# Altium PCB RGB_pcb.PcbDoc
Units mm, origin at the board's own origin, x right, y up, seen from the top; angles counter-clockwise.
Board outline 104 x 110 mm, 2 copper layers (Top Layer, Bottom Layer); 43 components, 45 nets, 164 pads, 15 vias.
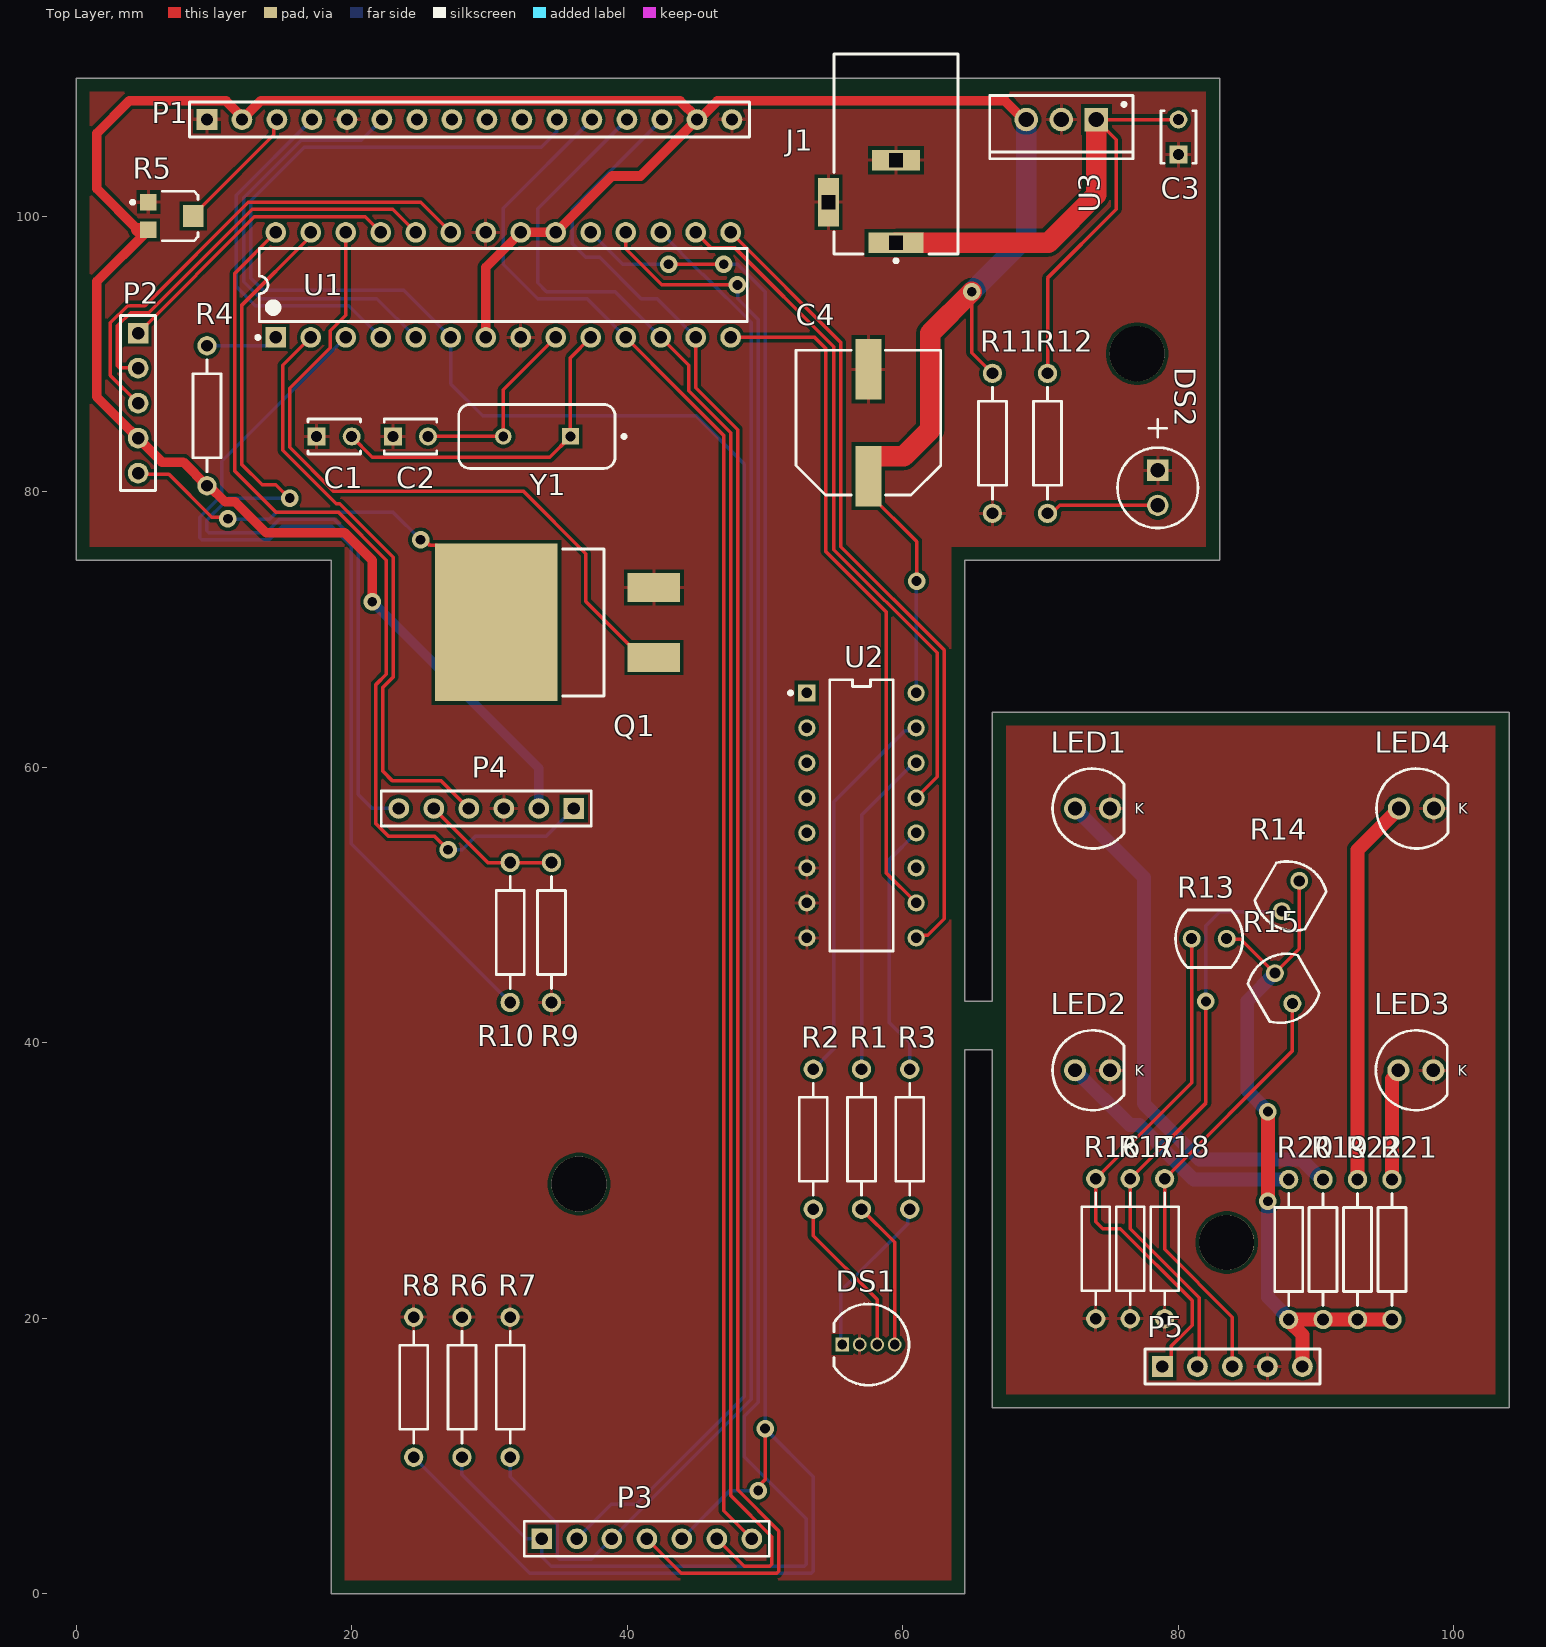
[diagram p0: Top Layer view]
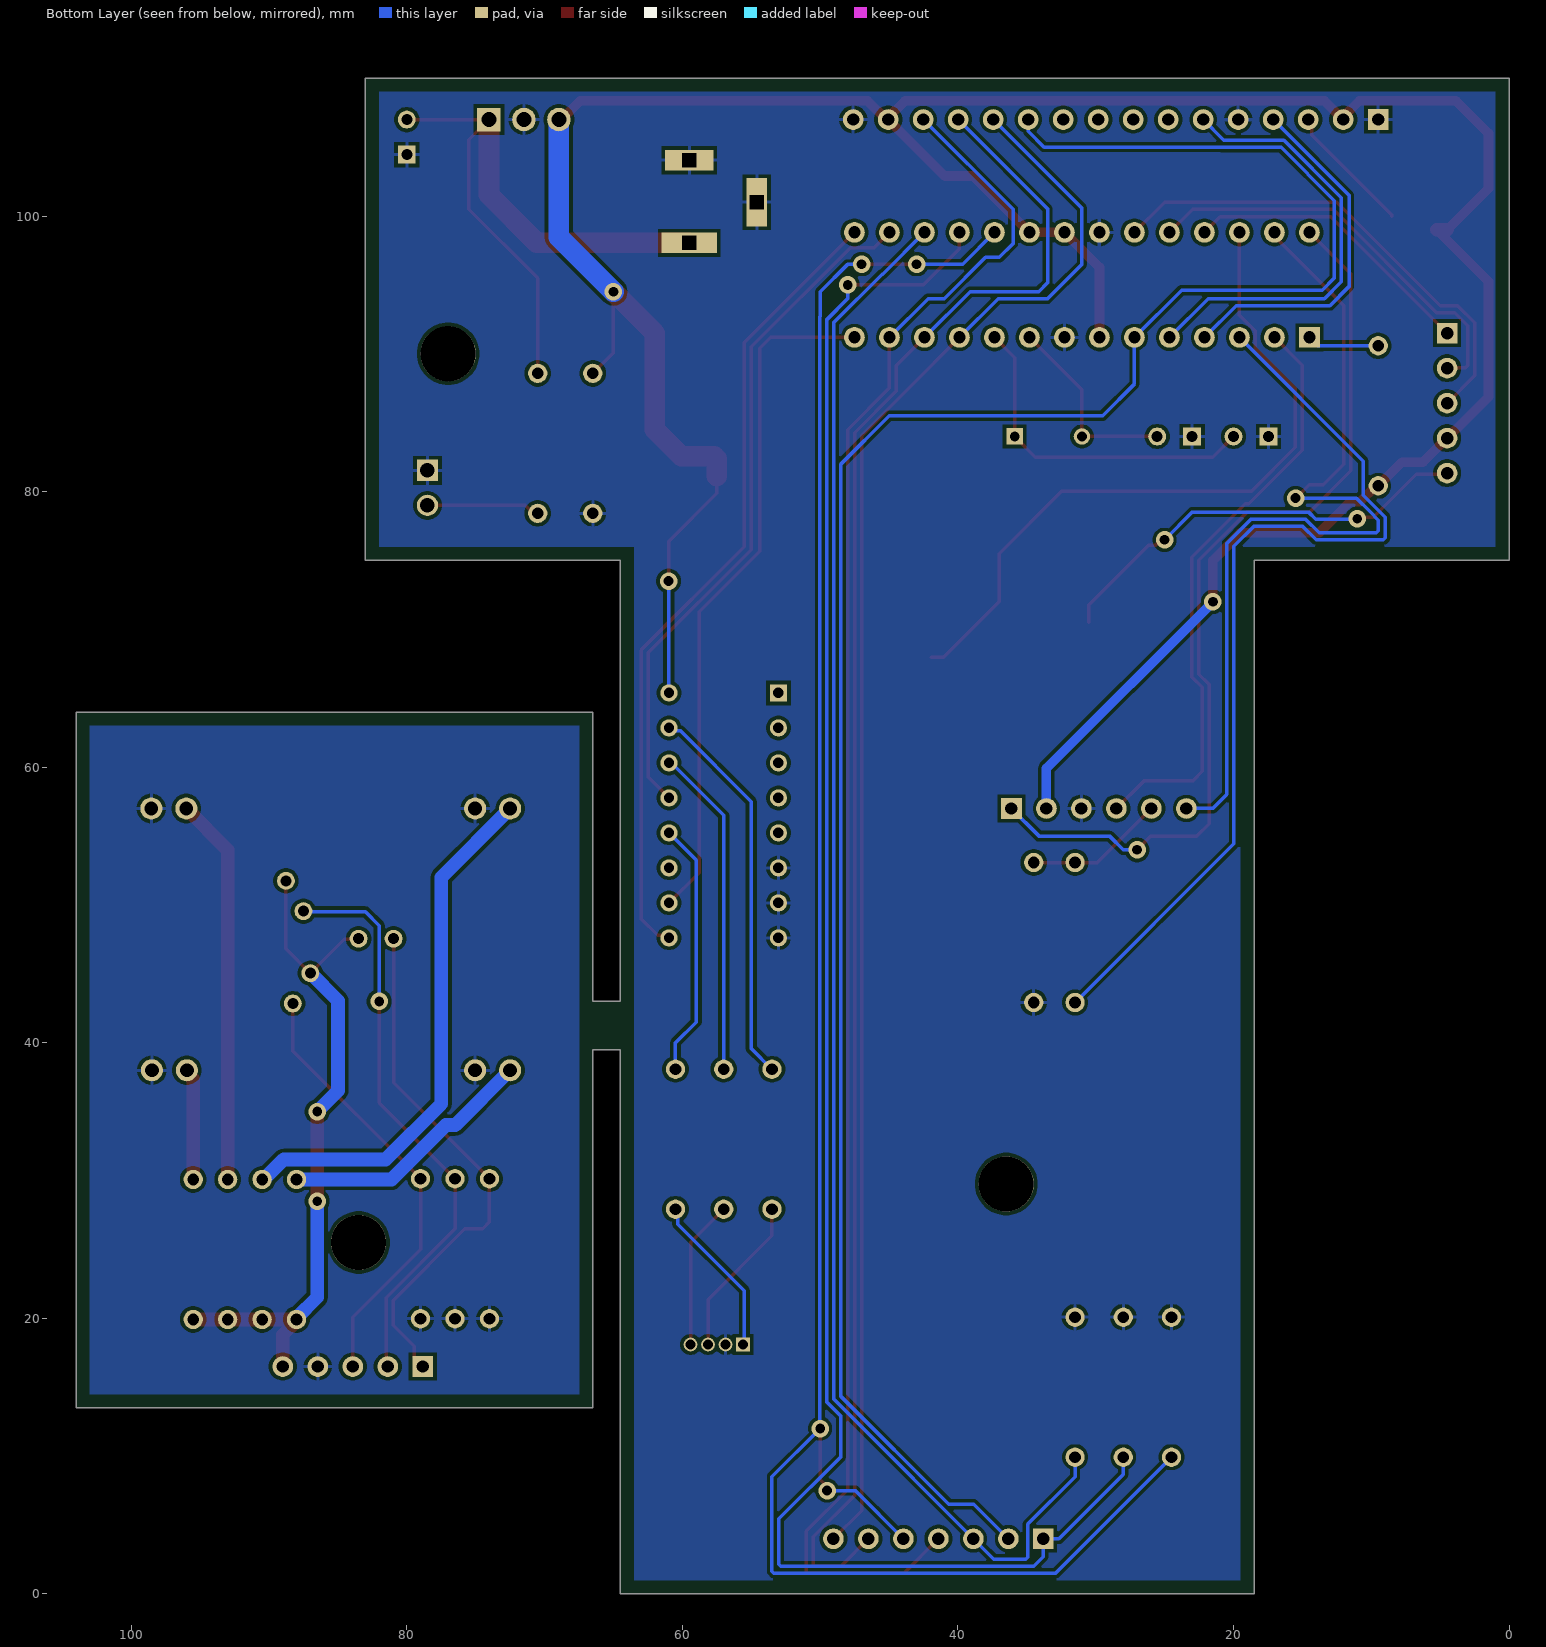
[diagram p1: Bottom Layer view, seen from below]

## Layer stack, top to bottom
Top Solder: solder mask 0.0102, Solder Resist, Dk 3.5
Top Layer: signal copper 0.0356
Dielectric 1: dielectric 0.32, FR-4, Dk 4.8
Bottom Layer: signal copper 0.0356
Bottom Solder: solder mask 0.0102, Solder Resist, Dk 3.5

## Board outline
64.5,39.5 66.5,39.5 66.5,13.5 104,13.5 104,64 66.5,64 66.5,43 64.5,43 64.5,75 83,75 83,110 0,110 0,75 18.5,75 18.5,0 64.5,0

## Design rules (kind name [scope] priority, off if disabled: settings)
Clearance [All] p1: gap=0.254 ignorepadtopadclearanceinfootprint=FALSE except(0: Arc-Hole Track-Hole SMDPad-Hole THPad-Hole Via-Hole Fill-Hole Poly-Hole Region-Hole Text-Hole)
FanoutControl Fanout_Default [All] p1: bgadir=Out bgaviamode=Centered fanoutstyle=Auto fanoutdirection=Alternating viagrid=0.025 // Fanout_Default (Default Rule)
FanoutControl Fanout_Small [(CompPinCount < 5)] p2: bgadir=Out bgaviamode=Centered fanoutstyle=Auto fanoutdirection=OutThenIn viagrid=0.025 // Fanout_Small (Default Rule)
FanoutControl Fanout_LCC [IsLCC] p4: bgadir=Out bgaviamode=Centered fanoutstyle=Auto fanoutdirection=Alternating viagrid=0.025 // Fanout_LCC (Default Rule)
FanoutControl Fanout_BGA [IsBGA] p5: bgadir=Out bgaviamode=Centered fanoutstyle=Auto fanoutdirection=Alternating viagrid=0.025 // Fanout_BGA (Default Rule)
PolygonConnect [All] p1: connectstyle=Relief reliefconductorwidth=0.254 reliefentries=4 polygonreliefangle="90 Angle" airgapwidth=0.254
RoutingVias [All] p1: holewidth=0.711 width=1.27 viastyle="Through Hole" minholewidth=0.711 minwidth=1.27 maxholewidth=0.711 maxwidth=1.27
SolderMaskExpansion [All] p1: expansion=0.102 istentingtop=FALSE
Width [All] p1: maxlimit=5 minlimit=0.254 preferedwidth=0.254
26 further rules are at their usual default settings.

## Components (designator, comment, footprint, x,y, rotation, side; value= is the part's Value field where it differs from the comment)
C1 "22pF" KEMT-C315-THT-2 18.73,84 r0 top
C2 "22pF" KEMT-C315-THT-2 24.27,84 r0 top
C3 "0.22uF" KEMT-C315-THT-2 80,105.73 r90 top
C4 "220UF" PNSC-EEE-1HA221P_L 57.5,85 r90 top
DS1 "" KING-WP154A4SUREQBFZGC_V 57.5,18.095 r90 top
DS2 "HLMP-3301" AVAG-HLMP-3301-2 78.5,81.54 r270 top
J1 "12-9 v" LUMB-NEB21R_V 59.5,104.5 r180 top
LED1 "151053RS03000" "Type 5mm" 73.77,57 r0 top
LED2 "151053RS03000" "Type 5mm" 73.77,38 r0 top
LED3 "151053RS03000" "Type 5mm" 97.23,38 r0 top
LED4 "151053RS03000" "Type 5mm" 97.27,57 r0 top
P1 "Header 16" HDR1X16 9.5,107 r0 top
P2 "Header 5" HDR1X5 4.5,91.5 r270 top
P3 "Header 7" HDR1X7 33.8,4 r0 top
P4 "Header 6" HDR1X6 36.12,57 r180 top
P5 "Header 5" HDR1X5 78.84,16.5 r0 top
Q1 "IRLZ44N" FP-PG-TO263-3-MFG 34.945,70.5 r90 top
R1 "100" AXIAL-0.4 57,33 r90 top
R2 "110" AXIAL-0.4 53.5,33 r90 top
R3 "100" AXIAL-0.4 60.5,33 r90 top
R4 "10K" AXIAL-0.4 9.5,85.5 r270 top
R5 "10K" BOUR-TC33X-2_V 7.05,100 r0 top
R6 "10K" AXIAL-0.4 28,15 r270 top
R7 "10K" AXIAL-0.4 31.5,15 r270 top
R8 "10K" AXIAL-0.4 24.5,15 r270 top
R9 "2K" AXIAL-0.4 34.5,48 r90 top
R10 "1K" AXIAL-0.4 31.5,48 r270 top
R11 "1M" AXIAL-0.4 66.5,83.5 r90 top
R12 "470" AXIAL-0.4 70.5,83.5 r90 top
R13 "VT90N1" EXCE-VT90N1 82.23,47.55 r0 top
R14 "VT90N1" EXCE-VT90N1 88.135,50.65 r60 top
R15 "VT90N1" EXCE-VT90N1 87.635,43.95 r120 top
R16 "10K" AXIAL-0.4 74,25.05 r90 top
R17 "10K" AXIAL-0.4 76.5,25.05 r90 top
R18 "10K" AXIAL-0.4 79,25.05 r90 top
R19 "220" AXIAL-0.4 90.5,25 r270 top
R20 "220" AXIAL-0.4 88,25 r270 top
R21 "220" AXIAL-0.4 95.5,25 r270 top
R22 "220" AXIAL-0.4 93,25 r270 top
U1 "ATmega328-PU" 28P3 31,95 r90 top
U2 "CD4052BE" FP-N0016A-MFG 57,56.5 r0 top
U3 "L78M05CV" TO220 71.5,107 r180 top
Y1 "FOXSLF/160-20" FOX-FOXSLF160-20 33.44,84 r180 top

## Footprints (in the part's own frame and the unit in brackets; to place one, negate y for a bottom-side part, rotate by r counter-clockwise, add the part's x,y. Pads: shape width x height; smd on the part's side, far side on the other; paste and mask are expansions set on the pad)
28P3 [mm] "28-Pin Plastic Dual In-Line Package (PDIP)"
  rect 1.5x1.5 hole 0.9: 1(-3.81,16.51)
  round 1.5 hole 0.9: 2(-3.81,13.97) 3(-3.81,11.43) 4(-3.81,8.89) 5(-3.81,6.35) 6(-3.81,3.81) 7(-3.81,1.27) 8(-3.81,-1.27) 9(-3.81,-3.81) 10(-3.81,-6.35) 11(-3.81,-8.89) 12(-3.81,-11.43) 13(-3.81,-13.97) 14(-3.81,-16.51) 15(3.81,-16.51) 16(3.81,-13.97) 17(3.81,-11.43) 18(3.81,-8.89) 19(3.81,-6.35) 20(3.81,-3.81) 21(3.81,-1.27) 22(3.81,1.27) 23(3.81,3.81) 24(3.81,6.35) 25(3.81,8.89) 26(3.81,11.43) 27(3.81,13.97) 28(3.81,16.51)
  silkscreen extent -3.93,-17.7 2.65,17.93, body extent -3.6,-17.65 3.6,17.65, height 4.58
AVAG-HLMP-3301-2 [mm] "THD, 2-Leads, Body Dia 5.85mm"
  rect 1.55x1.55 hole 1.05: 1(0,0)
  round 1.55 hole 1.05: 2(2.54,0)
  silkscreen extent -3.68,-2.92 4.19,2.92
AXIAL-0.4 [mm] "Axial Device, Thru-Hole; 2 Leads; 0.4 in Pin Spacing"
  round 1.4 hole 0.85: 1(-5.08,0) 2(5.08,0)
  silkscreen extent -4.06,-1.02 4.06,1.02
BOUR-TC33X-2_V [mm] "SMD, 3-Leads, Body 3.8x3.6mm"
  rect 1.2x1.2 smd: 1(-1.8,1) 3(-1.8,-1)
  rect 1.5x1.6 smd: 2(1.45,0)
  silkscreen extent -3.07,-1.8 1.8,1.8, body extent -2,-1.8 1.96,1.8, height 1.15
EXCE-VT90N1 [mm] "THD, 2-Leads, Body Width 4.17mm (Max), Height 2.29mm"
  round 1.3 hole 0.8: 1(-1.27,0) 2(1.27,0)
  silkscreen extent -2.44,-2.08 2.44,2.08, body extent -2.44,-2.09 2.44,2.09, height 2.29
FOX-FOXSLF160-20 [mm] "THD, 2-Leads, Body 11.35x4.65mm"
  rect 1.2x1.2 hole 0.7: 1(-2.44,0)
  round 1.2 hole 0.7: 2(2.44,0)
  silkscreen extent -6.45,-2.32 5.68,2.32, body extent -5.67,-2.32 5.68,2.33, height 3.6
FP-N0016A-MFG [mm]
  rect 1.25x1.25 hole 0.75 paste-1000 mask+0: 1(-3.97,8.89)
  round 1.25 hole 0.75 paste-1000 mask+0: 2(-3.97,6.35) 3(-3.97,3.81) 4(-3.97,1.27) 5(-3.97,-1.27) 6(-3.97,-3.81) 7(-3.97,-6.35) 8(-3.97,-8.89) 9(3.97,-8.89) 10(3.97,-6.35) 11(3.97,-3.81) 12(3.97,-1.27) 13(3.97,1.27) 14(3.97,3.81) 15(3.97,6.35) 16(3.97,8.89)
  silkscreen extent -5.27,-9.84 2.3,9.84, body extent -4.69,-9.94 4.69,9.94, height 0.25
FP-PG-TO263-3-MFG [mm]
  rect 2.08x3.81 smd paste+0 mask+0: 1(-2.54,-6.985) 3(2.54,-6.985)
  rect 11.43x8.89 smd paste+0 mask+0: 4(0,4.445)
  silkscreen extent -5.34,-3.36 5.34,-0.38, body extent -5.81,-8.99 5.81,8.99, height 0.25
HDR1X5 [mm] "Connector; Header; 5 Position"
  rect 1.5x1.5 hole 0.9: 1(0,0)
  round 1.5 hole 0.9: 2(2.54,0) 3(5.08,0) 4(7.62,0) 5(10.16,0)
  silkscreen extent -1.27,-1.27 11.43,1.27
HDR1X6 [mm] "Connector; Header; 6 Position"
  rect 1.5x1.5 hole 0.9: 1(0,0)
  round 1.5 hole 0.9: 2(2.54,0) 3(5.08,0) 4(7.62,0) 5(10.16,0) 6(12.7,0)
  silkscreen extent -1.27,-1.27 13.97,1.27
HDR1X7 [mm] "Connector; Header; 7 Position"
  rect 1.5x1.5 hole 0.9: 1(0,0)
  round 1.5 hole 0.9: 2(2.54,0) 3(5.08,0) 4(7.62,0) 5(10.16,0) 6(12.7,0) 7(15.24,0)
  silkscreen extent -1.27,-1.27 16.51,1.27
HDR1X16 [mm] "Connector; Header; 16 Position"
  rect 1.5x1.5 hole 0.9: 1(0,0)
  round 1.5 hole 0.9: 2(2.54,0) 3(5.08,0) 4(7.62,0) 5(10.16,0) 6(12.7,0) 7(15.24,0) 8(17.78,0) 9(20.32,0) 10(22.86,0) 11(25.4,0) 12(27.94,0) 13(30.48,0) 14(33.02,0) 15(35.56,0) 16(38.1,0)
  silkscreen extent -1.27,-1.27 39.37,1.27
KEMT-C315-THT-2 [mm] "THD, 2-Leads, Body 3.81x2.54mm"
  rect 1.3x1.3 hole 0.8: 1(-1.27,0)
  round 1.3 hole 0.8: 2(1.27,0)
  silkscreen extent -1.91,-1.27 1.91,1.27, body extent -1.91,-1.27 1.91,1.27, height 4.66
KING-WP154A4SUREQBFZGC_V [mm] "THD, 4-Leads, Dia 5.9mm, Pitch 1.27mm"
  rect 1x1 hole 0.7 paste+0: 1(0,1.905)
  round 1 hole 0.7 paste+0: 2(0,0.635) 3(0,-0.635) 4(0,-1.905)
  silkscreen extent -2.95,-2.95 2.95,2.5
LUMB-NEB21R_V [mm] "THD, 3-Leads, Body 14.5x9mm"
  rect 4x1.5 hole 1 square: 1(0,6.45)
  rect 1.5x3.5 hole 1 square: 2(4.9,3.5)
  rect 3.5x1.5 hole 1 square: 3(0,0.45)
  silkscreen extent -4.5,-7.25 4.5,7.87, body extent -4.5,-7.25 5.2,7.25, height 11
PNSC-EEE-1HA221P_L [mm] "Aluminum Electrolytic Capacitor, 2-Leads, Body 10.5x10.5mm, IPC High Density"
  rect 4.4x1.9 smd: 1(-3.875,0) 2(3.875,0)
  silkscreen extent -5.25,-5.25 5.25,5.25, body extent -5.36,-5.25 5.36,5.25, height 10.5
TO220 [mm] "TO, Thru-Hole, Vertical, Heatsink Mounted; 3 In-Line Leads; Pitch 2.54 mm"
  rect 1.7x1.7 hole 1.1: 1(-2.54,0)
  round 1.7 hole 1.1: 2(0,0) 3(2.54,0)
  silkscreen extent -5.2,-1.75 5.2,2.85, body extent -5.25,-1.8 5.25,2.9, height 19.7
"Type 5mm" [mm] "THT, LED-5mm, 2pin- Body 5.8mm"
  round 1.6 hole 1: 1(1.27,0) 2(-1.27,0)
  silkscreen extent -2.9,-2.9 2.29,2.9, body extent -2.9,-2.9 2.5,2.9, height 11.7

## Part data
C1 C2 C3: library part CMP-1664-00008-1, "Capacitor, Ceramic, 22 pF, +/-10 %, 100 V, -55 to 125 degC, 2-Pin THD, RoHS, Bulk", Case\Package=TO-220, Max Input Voltage="40 V", Max Operating Temperature="125 degC", Max Ouput Current="1.5 A", Min Input Voltage="4.2 V", Min Operating Temperature="0 degC", Output Voltage="1.2 V", Package Quantity=50, ComponentLink1Description="Manufacturer URL", ComponentLink1URL=http://www.kemet.com/, ComponentLink2Description=Datasheet, ComponentLink2URL=http://capacitoredge.kemet.com/capedge2/DataSheet/Datasheet-C315C220K1G5TA.pdf?pn=C315C220K1G5TA{BULK}, DatasheetVersion=Aug-16, Height="9.28 mm", Length="10.28 mm", Mount="Through Hole", Output Current="1.5 A", Outputs=1, PackageDescription="2-Pin Through Hole Device, Body 3.81 x 2.54 mm", PackageReference=C315-THT-2, Packaging=Rail/Tube, Pins=3, Radiation Hardening=No, REACH SVHC="No SVHC", RoHSCompliant=true, Weight="0.08113 oz", Width="4.82 mm"
C4: library part CMP-2000-06200-1, "Aluminum Electrolytic Capacitor, 220 uF, +/- 20%, 50 V, -40 to 85 degC, 2-Pin SMD, RoHS, Tape and Reel", AE Capacitor Case=RadialCan-SMD, Capacitance=220µF, Capacitance Tolerance=±20%, Life Time @ Temperature=2000hours@85°C, Manufacturer=Panasonic, Operating Temperature Max=85°C, Operating Temperature Min=-40°C, Package Description="2-Pin Surface Mount Device, Body 10.3 x 10.3 mm", Package Reference=SMD, Ripple Current AC=300mA, Voltage Rating=50V, Capacitance Tolerance ±=±20%, Capacitor Case Style=RadialCan-SMD, Datasheet URL=http://datasheet.octopart.com/EEE-1HA221P-Panasonic-datasheet-13265900.pdf, Datasheet Version=11/2012, Diameter=10mm, Height=10.2mm, Lifetime @ Temperature=2000hours@85°C, Manufacturer URL=http://www.panasonic.com/, Mounting Technology=SurfaceMount, Packaging=CutTape, Product Range=PANASONIC-SSeries, SVHC=ToBeAdvised
DS1: library part CMP-2000-07415-1, "Full Color LED Lamp, Dominant Wavelength RGB 630 / 525 / 465 nm, -40 to 85 degC, 4-Pin THD, RoHS", Color=Red,Green,Blue(RGB), Current - Test=20mA, Manufacturer=Kingbright, Millicandela Rating=1300mcdRed,1700mcdGreen,900mcdBlue, Package / Case=Radial-4Leads, Package Description="4-Pin Through Hole LED, Dia 5.9 mm, Pitch 1.27 mm", Package Reference=WP154A4SUREQBFZGC, Standard Package=500, Voltage - Forward (Vf) (Typ)=1.9VRed,3.3VGreen,3.3VBlue, 3D Model="WP154A4SUREQBFZGW.sldprt /  / WP154A4SUREQBFZGW.pro /  / WP154A4SUREQBFZGW.igs /  / WP154A4SUREQBFZGW.stp", Category=Optoelectronics, Datasheet URL=https://www.kingbrightusa.com/images/catalog/spec/WP154A4SUREQBFZGC.pdf, Datasheet Version="Rev. 5A, 08/2014", Family=LEDIndication-Discrete, Height=8.60mm, Lens Style/Size=RoundwithDomedTop,5mm,T-13/4, Lens Type=Clear, Manufacturer URL=http://www.kingbright.com/, Mounting Technology=ThroughHole, Mounting Type=ThroughHole, Online Catalog=5mm,T-13/4(RGB)RoundwithDomedTopLEDLamp, Other Names="754-1615 / WP154A4SUREQBFZGC-ND", Packaging=Bulk, Viewing Angle=50°, Wavelength - Dominant=630nm,525nm,465nm, Wavelength - Peak=645nm,515nm,460nm
DS2: library part CMP-2000-06411-1, "T-1 3/4 (5 mm) Diffused LED Lamp, 1.9 V, -40 to 100 degC, 2-Pin THD, RoHS, Bulk", Emitting Color=Red, Forward Current=25mA, Forward Voltage=2.4V, Manufacturer=Avago, Operating Temp Range=-40Cto100C, Operating Temperature Classification=Industrial, Package Description="2-Pin Through Hole LED, Dia 5.85 mm", Package Type=T-13/4, Power Dissipation=85W, Reverse Voltage=5V, Test Current (It)=10mA, Chip Material=GaP, Datasheet URL=http://www.avagotech.com/docs/AV02-1558EN, Datasheet Version=03/2015, DELETED=Compliant, Dominant Wave Length=626nm, High Brightness=No, Lens Dimensions=5.08x5.08x8.3mm, Lens Type=ColoredDiffused, Lum Intensity=5.4mcd, Luminous Intensity=5.4mcd, Main Category=StandardLED, Manufacturer URL=http://www.avagotech.com/, Mounting=ThroughHole, Mounting Technology=ThroughHole, Number of  Elements=1, Package Reference=HLMP-3301, Packaging=TapeandReel, Peak Wavelength=635nm, Pin Count=2, Product Depth (mm)=6.1mm, Product Height (mm)=9.19mm, Product Length (mm)=6.1mm, Rad Hardened=No, Shape Type=Circular, Type=Uni-Color, Viewing Angle=60deg
J1: library part CMP-2000-06841-1, "Jack Socket, Body 14.5 x 9 mm, Height 11 mm, -20 to 70 degC, 3-Pin THD, RoHS, Bulk", Current Rating=3A, Manufacturer=Lumberg, Maximum Operating Temperature=+70°C, Minimum Operating Temperature=-20°C, Package Description="3-Pin Through Hole Device, Body 14.5 x 9 mm, Height 11 mm", Package Reference=NEB21R, Voltage Rating=12Vdc, Body Orientation=RightAngle, Datasheet URL=https://datasheet.ciiva.com/11720/0900766b805694d6-11720273.pdf, Datasheet Version=12/2004, Manufacturer URL=http://www.lumberg.com/, Mounting Technology=ThroughHole, Mounting Type=ThroughHole, Plug/Socket=Socket, Termination Method=Solder
LED1 LED2 LED3 LED4: library part CMP-1489-00007-1, "THT LED round mono-color waterclear,  WL-TMRW ,Red", Emitting Color=Red, Manufacturer="Wuerth Elektronik", ComponentLink1Description="Manufacturer URL", ComponentLink1URL=http://www.we-online.com, ComponentLink2Description=Datasheet, ComponentLink2URL=http://katalog.we-online.de/pbs/datasheet/7448042001.pdfhttp://katalog.we-online.de/pbs/datasheet/7448042001.pdfhttp://katalog.we-online.de/pbs/datasheet/7448042001.pdfhttp://katalog.we-online.de/pbs/datasheet/151053RS03000.pdf, PackageReference="Type 5mm", PartNumber=151053RS03000
P1: "Header, 16-Pin", LatestRevisionDate=17-Jul-2002, LatestRevisionNote="Re-released for DXP Platform.", Publisher="Altium Limited"
P2 P5: "Header, 5-Pin", LatestRevisionDate=17-Jul-2002, LatestRevisionNote="Re-released for DXP Platform.", Publisher="Altium Limited"
P3: "Header, 7-Pin", LatestRevisionDate=17-Jul-2002, LatestRevisionNote="Re-released for DXP Platform.", Publisher="Altium Limited"
P4: "Header, 6-Pin", LatestRevisionDate=17-Jul-2002, LatestRevisionNote="Re-released for DXP Platform.", Publisher="Altium Limited"
Q1: library part CMP-32901-000495-1, "MOSFET N-CH 55V 47A D2PAK", Case/Package=D2PAK, Continuous Drain Current (ID)=47A, Drain to Source Breakdown Voltage=55V, Drain to Source Resistance=35mR, Gate to Source Voltage (Vgs)=16V, Input Capacitance=1.7nF, Max Operating Temperature=175°C, Max Power Dissipation=3.8W, Min Operating Temperature=-55°C, Power Dissipation=110W, Threshold Voltage=2V, Drain to Source Voltage (Vdss)=55V, Element Configuration=Single, Halogen Free="Halogen Free", Height=0.19inch, Lead Free="Contains Lead", Length=0.42inch, Max Dual Supply Voltage=55V, Mount="Surface Mount", Number of Pins=3, Packaging="Tape and Reel", Rds On Max=22mR, REACH SVHC="No SVHC", RoHS Compliant=Yes, Turn-Off Delay Time=26ns, Turn-On Delay Time=11ns, Width=0.38inch
R1 R2 R3 R4 R6 R7 R8 R9 R10 R11 R12 R16 R17 R18 R19 R20 R21 R22: library part Res2, "Resistor", LatestRevisionDate=17-Jul-2002, LatestRevisionNote="Re-released for DXP Platform.", PackageDescription="Axial Device, Thru-Hole; 2 Leads; 0.4 in Pin Spacing", PackageReference=AXIAL-0.4, Published=8-Jun-2000, Publisher="Altium Limited"
R5: library part CMP-2100-03695-1, "Trimming Potentiometer, 10000 Ohm, -40 to 100 degC, 3-Pin SMD, RoHS, Tape and Reel", Case/Package=SMD/SMT, Colour=Silver, Manufacturer=Bourns, Max Operating Temperature=100degC, Max Power Dissipation=100mW, Min Operating Temperature=-40degC, Package Description="3-Pin Surface Mount Device, Body 3.8 x 3.6 mm", Package Quantity=2500, Package Reference=TC33X-2, Resistance=10KOhm, Temperature Coefficient=250ppm/degreesC, Tolerance=25%, Voltage Rating (DC)=50V, Composition=Potentiometer, Contact Plating=Silver, Datasheet URL=http://www.bourns.com/docs/Product-Datasheets/TC33.pdf, Datasheet Version=42583.0, Depth=3.8mm, Height=0.047inch, Lead Free=LeadFree, Length=3mm, Manufacturer URL=http://www.bourns.com/, Military Standard=Not, Mount=SurfaceMount, Number of Turns=1, Packaging=TapeandReel, Power Rating=100mW, Radiation Hardening=No, REACH SVHC=NoSVHC, RoHSCompliant=true, Taper=Linear, Termination=FootPrint, Weight=29.4mg, Width=0.118inch
R13 R14 R15: library part CMP-2000-07406-1, "Photoconductive Resistor, 200 kOhm, 100 V, 80 mW, -40 to 75 degC, 2-Pin THD, RoHS", Dark Resistance=200kohm, Manufacturer="Excelitas Technology", Operating Temperature Max=75°C, Operating Temperature Min=-40°C, Package Description="2-Pin Through Hole Device, Body Width 4.17 mm (Max), Height 2.29 mm", Power Rating=80mW, Resistance @ Lux=12kohm, Resistor Case Style=-, Voltage Rating=100V, Datasheet URL=http://datasheet.octopart.com/VT90N1-Excelitas-datasheet-10388451.pdf, Datasheet Version=09/2006, Manufacturer URL=http://www.excelitas.com/Pages/Index.aspx, Mounting Technology=ThroughHole, Package Reference=VT90N1, Packaging=Each, Product Range=-, SVHC=Cadmiumchloride(15-Jun-2015)
U1: library part CMP-0095-00015-2, "8-bit AVR Microcontroller, 32KB Flash, 1KB EEPROM, 2KB SRAM, 28-pin PDIP, Industrial Grade (-40°C to 85°C)", ComponentLink1Description="Manufacturer URL", ComponentLink1URL=http://www.atmel.com/, ComponentLink2Description="ATmega48A/48PA/88A/88PA/168A/168PA/328/328P Datasheet", ComponentLink2URL=http://www.atmel.com/dyn/resources/prod_documents/8271.pdf, ComponentLink3Description="ATmega48A/48PA/88A/88PA/168A/168PA/328/328P Summary", ComponentLink3URL=http://www.atmel.com/dyn/resources/prod_documents/8271S.pdf, DatasheetVersion="revD, May-2011", PackageDescription="28-lead (0.300\"/7.62mm Wide) Plastic Dual Inline Package (PDIP)", PackageReference=28P3, PackageVersion="revB, Sep-2001", RevisionNote="DatasheetVersion updated. URLs added."
U2: library part CMP-1575-00066-5, "IC MUX/DEMUX DUAL 4X1 16DIP", Case/Package=PDIP, Max Dual Supply Voltage=9V, Max Input Voltage=20V, Max Operating Temperature=125°C, Min Dual Supply Voltage=2.5V, Min Operating Temperature=-55°C, Min Supply Voltage=3V, Nominal Supply Current=80nA, On-State Resistance=240R, Operating Supply Voltage=18V, Package Quantity=25, Bandwidth=25MHz, Contact Plating=Gold, Lead Free="Lead Free", Logic Function=Multiplexer, Max Supply Voltage=20V, Mount="Through Hole", Number of Bits=4, Number of Channels=2, Number of Circuits=2, Number of Inputs=8, Number of Outputs=2, Number of Pins=16, Number of Terminals/Pins=16, Operating Supply Current=80nA, Packaging=Rail/Tube, Polarity=Non-Inverting, Propagation Delay=60ns, Quiescent Current=80nA, Radiation Hardening=No, REACH SVHC="No SVHC", RoHS Compliant=Yes, Supply Type=Single, Throw Configuration=SP4T, Turn-Off Delay Time=450ns, Turn-On Delay Time=720ns, Weight=0.03357oz, Width=7.62mm
U3: library part CMP-0244-00437-1, "Positive Voltage Regulator, 5V, 3-Pin TO-220", ComponentLink1Description="Manufacturer URL", ComponentLink1URL=http://www.st.com, ComponentLink2Description=Datasheet, ComponentLink2URL=http://www.st.com/internet/com/TECHNICAL_RESOURCES/TECHNICAL_LITERATURE/DATASHEET/CD00000447.pdf, ComponentLink3Description="Package Specification", ComponentLink3URL=http://www.st.com/internet/com/TECHNICAL_RESOURCES/TECHNICAL_LITERATURE/PACKAGE_INFORMATION/CD00004649.pdf, DatasheetVersion=1/11/2010, PackageDescription="TO, Thru-Hole, Vertical, Heatsink Mounted; 3 In-Line Leads; Pitch 2.54 mm", PackageReference=TO220, PackageVersion=ver3.0
Y1: library part CMP-1749-00003-1, "Resistance Weld Thru-Hole Crystal, 16 MHz, -20 to 70 degC, 2-Pin THD, RoHS, Bulk", Case\Package=Axial, Max Operating Temperature="155 degC", Min Operating Temperature="-55 degC", Package Quantity=200, Power Rating="250 mW", Resistance="221 kohm", Tolerance=1%, Voltage Rating="250 V", ComponentLink1Description="Manufacturer URL", ComponentLink1URL=http://www.foxonline.com/, ComponentLink2Description=Datasheet, ComponentLink2URL=http://www.foxonline.com/pdfs/hc49slf.pdf, DatasheetVersion=Mar-15, Length="0.248 inch", Mount="Through Hole", PackageDescription="2-Pin Through Hole Device, Body 11.35 x 4.65 mm", PackageReference=FOXSLF160-20, Packaging=Bulk, RoHSCompliant=true

## Free pads (board coordinates)
  round 4 hole 4 unplated: ""(36.5,29.746) ""(77,90) ""(83.5,25.5)

## Via types
v1: diameter 1.27, hole 0.711, Top Layer to Bottom Layer, 15 vias

## Nets (pads, with @x,y where several pads share a name; then routed paths per layer and width w, separated by ;. In a path a pad name is that pad's centre, name@x,y a point inside that pad or via, vN(x,y) a via of type N, cw(c..) or ccw(c..) an arc to the next point about the centre after c; other vN are vias at no path point)
+5: C4.1 P1.2 P1.15 P2.4 P4.2 R4.2 R5.3 R11.2 U1.7 U1.20 U1.21 U2.16 U3.3 | length 222.3
  Top Layer w0.254: C4.1 57.5,79.875 61,76.375 v1(61,73.5) ; v1(65,94.5) 65,90.08 R11.2
  Top Layer w0.7: 4.5,99 1.5,102 1.5,106 3.854,108.354 8.5,108.354 10.876,108.354 12.04,107.19 P1.2 ; R5.3 1.5,95.25 1.5,86.88 6.24,82.14 7.78,82.14 R4.2 9.661,80.42 10.818,79.263 11.537,79.263 13.8,77 19.5,77 21.5,75 v1(21.5,72) ; P1.2@12.27,107.23 13.394,108.354 43.841,108.354 P1.15@45.06,107.135 ; U1.7 29.73,96.27 U1.21 U1.20 38.905,102.905 40.965,102.905 P1.15 ; P1.15@45.195,107 46.549,108.354 67.417,108.354 U3.3@68.771,107
  Top Layer w1: 4.5,99 R5.3 ; P1.2 P1.2@12.04,107.026 ; P1.15@45.06,107.135 P1.15 P1.15@45.195,107 ; U3.3@68.771,107 U3.3
  Top Layer w1.5: C4.1 57.5,82.375 57.7,82.575 60.075,82.575 62,84.5 62,91.5 v1(65,94.5)
  Bottom Layer w0.254: U2.16 60.985,65.405 60.985,73.485 v1(61,73.5)
  Bottom Layer w0.7: v1(21.5,72) 33.58,59.92 P4.2
  Bottom Layer w1.5: v1(65,94.5) 68.96,98.46 U3.3
+12: C3.2 J1.1 R12.2 U3.1 | length 48.6
  Top Layer w0.254: J1.1@59.5,98 J1.1 ; R12.2 70.5,95.5 75.5,100.5 75.5,105.54 U3.1 C3.2
  Top Layer w1.5: J1.1 70.55,98.05 74.04,101.54 U3.1
GND: C1.1 C2.1 C3.1 C4.2 DS1.2 DS2.1 J1.2 J1.3 P1.1 P1.5 P1.16 P4.3 Q1.3 R5.1 R6.1 R7.1 R8.1 R9.1 R11.1 U1.8 U1.22 U2.6 U2.7 U2.8 U3.2
NetC1_2: C1.2 U1.10 Y1.1 | length 24.9
  Top Layer w0.254: C1.2 21.5,82.5 34.38,82.5 Y1.1 35.88,89.72 U1.10
NetC2_2: C2.2 U1.9 Y1.2 | length 14.2
  Top Layer w0.254: C2.2 Y1.2 31,87.38 U1.9
NetDS1_1: DS1.1 R3.1 | length 11.9
  Bottom Layer w0.254: DS1.1 55.5,18.19 55.5,22 60.339,26.839 60.339,27.759 R3.1
NetDS1_3: DS1.3 R2.1 | length 11.7
  Top Layer w0.254: R2.1 53.5,26 58.135,21.365 DS1.3
NetDS1_4: DS1.4 R1.1 | length 10.8
  Top Layer w0.254: R1.1 59.405,25.515 DS1.4
NetDS2_2: DS2.2 R12.1 | length 8.2
  Top Layer w0.254: R12.1 70.81,78.42 71.39,79 DS2.2
NetLED1_1: LED1.1 LED2.1 LED3.1 LED4.1 P5.4 R16.1 R17.1 R18.1
NetLED1_2: LED1.2 R19.1 | length 38.8
  Bottom Layer w1: LED1.2 77.5,52 77.5,35.568 81.534,31.534 88.938,31.534 90.392,30.08 R19.1
NetLED2_2: LED2.2 R20.1 | length 18.8
  Bottom Layer w1: LED2.2 76.479,34.021 77.165,34.021 81.106,30.08 R20.1
NetLED3_2: LED3.2 R21.1 | length 8.1
  Top Layer w1: R21.1 95.5,37.378 95.96,37.838 LED3.2
NetLED4_2: LED4.2 R22.1 | length 28.2
  Top Layer w1: R22.1 93,54 LED4.2
NetP1_3: P1.3 R5.2 | length 9.5
  Top Layer w0.254: R5.2 8.5,100.05 14.342,105.892 14.342,106.762 P1.3
NetP1_4: P1.4 U1.4 | length 26.4
  Bottom Layer w0.254: P1.4 11.62,101.5 11.62,94.88 13,93.5 19.8,93.5 U1.4
NetP1_6: P1.6 U1.5 | length 32.6
  Bottom Layer w0.254: P1.6 20.7,105.5 16.338,105.5 12.169,101.331 12.169,95.239 13.4,94.008 21.832,94.008 U1.5
NetP1_11: P1.11 P3.2 U1.6 | length 158.3
  Bottom Layer w0.254: P1.11 34.9,106.149 33.751,105 20.918,105 20.91,104.992 16.549,104.992 12.677,101.12 12.677,95.5 13.563,94.614 23.766,94.614 U1.6 27.19,87.81 29.5,85.5 44.992,85.5 48.492,82 48.492,14.33 40.662,6.5 38.84,6.5 P3.2
NetP1_12: P1.12 P3.7 U1.11 | length 115.2
  Top Layer w0.254: U1.11 43.644,87.436 43.644,87.419 46.992,84.071 46.992,6.048 P3.7
  Bottom Layer w0.254: P1.12 31,100.56 31,96.5 33.5,94 37.08,94 U1.11
NetP1_13: P1.13 P3.6 U1.12 | length 122.4
  Top Layer w0.254: U1.12 44.462,89.158 44.462,87.32 47.5,84.282 47.5,7.139 50.492,4.147 50.492,2.157 50.343,2.008 48.492,2.008 P3.6
  Bottom Layer w0.254: P1.13 33.5,100.52 33.5,95.149 34.141,94.508 39.112,94.508 U1.12
NetP1_14: P1.14 P3.4 U1.13 | length 126.2
  Top Layer w0.254: P3.4 43.92,1.5 50.851,1.5 51,1.649 51,4.563 48.008,7.555 48.008,84.492 44.97,87.53 U1.13
  Bottom Layer w0.254: P1.14 36,100.48 36,98 37,97 38,97 41,94 42.16,94 U1.13
NetP2_1: P2.1 U1.25 | length 21.6
  Top Layer w0.254: P2.1 12.941,99.941 20.979,99.941 U1.25
NetP2_2: P2.2 U1.24 | length 30.3
  Top Layer w0.254: P2.2 4.46,89 3.149,89 3,89.149 3,92.039 3.953,92.992 5.274,92.992 12.774,100.492 22.968,100.492 U1.24
NetP2_3: P2.3 U1.23 | length 35.9
  Top Layer w0.254: P2.3 2.492,88.428 2.492,92.249 3.743,93.5 5,93.5 12.5,101 25,101 U1.23
NetP2_5: P2.5 Q1.4 | length 31.7
  Top Layer w0.254: P2.5 4.581,81.259 6.741,81.259 9.857,78.143 10.905,78.143 v1(11.024,78.024) ; v1(25,76.5) 25.275,76.5 25.687,76.088 26.182,76.088 30.5,71.77 Q1.4
  Bottom Layer w0.254: v1(11.024,78.024) 11.048,78 14.04,78 14.556,78.516 22.984,78.516 v1(25,76.5)
NetP3_1: P3.1 R6.2 U1.18 | length 136
  Top Layer w0.254: U1.18 39.89,97.61 42.5,95 v1(48,95)
  Bottom Layer w0.254: R6.2 28,8.669 32.669,4 P3.1 33.8,2.7 34.492,2.008 52.843,2.008 52.992,2.157 52.992,5.445 48.492,9.945 48.492,12.894 49.508,13.91 49.508,92.492 48.016,93.984 48.016,94.984 v1(48,95)
NetP3_3: P3.3 R7.2 U1.17 | length 115
  Bottom Layer w0.254: R7.2 31.5,8.5 34.931,5.069 34.931,2.665 35.08,2.516 37.396,2.516 49,14.12 49,92.282 45.496,95.786 45.454,95.786 U1.17
NetP3_5: P3.5 R8.2 U1.19 | length 153
  Top Layer w0.254: v1(43,96.5) v1(47,96.5) ; v1(49.5,7.5) 49.5,7.775 50,8.275 v1(50,12)
  Bottom Layer w0.254: R8.2 32.92,1.5 53.351,1.5 53.5,1.649 53.5,8.5 v1(50,12) 50.016,12.016 50.016,92.702 50,92.718 50,94.5 48.016,96.484 47.016,96.484 v1(47,96.5) ; U1.19 39.66,96.5 v1(43,96.5) ; P3.5 47.46,7.5 v1(49.5,7.5)
NetP4_1: P4.1 U1.28 | length 68.1
  Top Layer w0.254: U1.28 11.5,95.82 11.5,81.5 14.516,78.484 19.05,78.484 22.516,75.018 22.516,66.752 21.761,65.997 21.761,55.904 22.665,55 26,55 v1(27,54)
  Bottom Layer w0.254: v1(27,54) 27.016,54.016 28.016,54.016 29,55 34.12,55 P4.1
NetP4_4: P4.4 U1.2 | length 43.5
  Top Layer w0.254: U1.2 15,89.16 15,83 18.886,79.114 19.138,79.114 23.024,75.228 23.024,66.542 22.269,65.787 22.269,59.697 22.966,59 26.5,59 P4.4
NetP4_5: P4.5 R9.2 R10.1 | length 10.2
  Top Layer w0.254: P4.5 29.88,53.08 R10.1 R9.2
NetP4_6: P4.6 U1.27 | length 64.6
  Top Layer w0.254: v1(15.5,79.532) 15.468,79.532 14.5,80.5 13.5,80.5 12.008,81.992 12.008,93.508 17.03,98.53 U1.27
  Bottom Layer w0.254: v1(15.5,79.532) 15.484,79.516 11.079,79.516 10.091,78.528 10.083,78.528 9.488,77.933 9.488,77.925 9.484,77.921 9.484,77.157 9.633,77.008 13.79,77.008 14.79,78.008 18.492,78.008 18.71,78.008 20.484,76.234 20.484,76.016 20.484,58.016 21.5,57 P4.6
NetP5_1: P5.1 R13.1 R16.2 | length 38.5
  Top Layer w0.254: P5.1 79.463,17.123 79.463,17.963 80.992,19.492 80.992,21.29 75.782,26.5 74.5,26.5 74,27 R16.2 80.96,37.09 R13.1
NetP5_2: P5.2 R14.1 R17.2 | length 42.3
  Top Layer w0.254: P5.2 81.5,16.62 81.5,21.5 76.5,26.5 R17.2 82,35.63 v1(82,43)
  Bottom Layer w0.254: v1(82,43) 82,48.5 83,49.5 87.45,49.5 R14.1
NetP5_3: P5.3 R15.1 R18.2 | length 32.2
  Top Layer w0.254: P5.3 83.92,20.08 79,25 R18.2 88.27,39.4 R15.1
NetP5_5: P5.5 R13.2 R14.2 R15.2 R19.2 R20.2 R21.2 R22.2 | length 50.5
  Top Layer w0.254: R13.2 83.531,47.519 84.531,47.519 R15.2 88.77,46.82 R14.2
  Top Layer w1: v1(86.5,28.5) v1(86.5,35) ; P5.5 89,18.812 88,19.812 R20.2 R19.2 R22.2 R21.2
  Bottom Layer w1: v1(86.5,28.5) 86.5,21.528 88,20.028 R20.2 ; v1(86.5,35) 86.5,35.019 85,36.519 85,43.05 R15.2
NetQ1_1: Q1.1 U1.26 | length 52.1
  Top Layer w0.254: U1.26 19.57,92.789 18.439,91.658 18.439,90.439 15.508,87.508 15.508,83.21 18.71,80.008 32.492,80.008 37,75.5 37,72.025 41.065,67.96 Q1.1
NetR1_2: R1.2 U2.14 | length 24
  Bottom Layer w0.254: R1.2 57,56.5 60.81,60.31 U2.14
NetR2_2: R2.2 U2.15 | length 28.2
  Bottom Layer w0.254: R2.2 55,39.58 55,57.5 60.159,62.659 60.779,62.659 U2.15
NetR3_2: R3.2 U2.12 | length 18.6
  Bottom Layer w0.254: R3.2 60.5,40 59,41.5 59,53.26 U2.12
NetR4_1: R4.1 U1.1 | length 5.2
  Bottom Layer w0.254: R4.1 13.88,90.58 U1.1
NetR10_2: R10.2 U1.3 | length 68.9
  Bottom Layer w0.254: U1.3 10.581,82.201 10.581,79.744 8.976,78.139 8.976,76.649 9.125,76.5 14,76.5 15,77.5 18.5,77.5 19.976,76.024 19.976,54.444 R10.2
NetU1_14: U1.14 U2.10 | length 50.2
  Top Layer w0.254: U1.14 53.592,91.19 54.391,90.391 54.391,75.672 58.782,71.282 58.782,52.338 U2.10
NetU1_15: U1.15 U2.9 | length 58.8
  Top Layer w0.254: U1.15 55.5,90.82 55.5,76 63,68.5 63,49 61.801,47.801 61.161,47.801 U2.9
NetU1_16: U1.16 U2.13 | length 49.9
  Top Layer w0.254: U1.16 46.101,97.679 47.821,97.679 54.992,90.508 54.992,75.79 62.492,68.29 62.492,59.292 U2.13
pads on no net: P1.7 P1.8 P1.9 P1.10 U2.1 U2.2 U2.3 U2.4 U2.5 U2.11

## Polygon pours and split planes (outlines as drawn)
NetLED1_1 on Bottom Layer "NETLED1_1_L02_P004" (solid, pour order 4): 67.5,14.5 103,14.5 103,63 67.5,63
GND on Bottom Layer "GND_L02_P001" (solid, pour order 1): 19.5,1 63.5,1 63.5,76 82,76 82,109 1,109 1,76 19.5,76
NetLED1_1 on Top Layer "NETLED1_1_L01_P003" (solid, pour order 3): 67.5,14.5 103,14.5 103,63 67.5,63
GND on Top Layer "GND_L01_P002" (solid, pour order 2): 19.5,1 63.5,1 63.5,76 82,76 82,109 1,109 1,76 19.5,76

## Text inside footprints (layer, text, board x,y; h text height)
LED1: Top Overlay "K" at 76.818,56.619 h0.76; Mechanical 15 "K" at 76.818,56.619 h0.76
LED2: Top Overlay "K" at 76.818,37.619 h0.76; Mechanical 15 "K" at 76.818,37.619 h0.76
LED3: Top Overlay "K" at 100.278,37.619 h0.76; Mechanical 15 "K" at 100.278,37.619 h0.76
LED4: Top Overlay "K" at 100.318,56.619 h0.76; Mechanical 15 "K" at 100.318,56.619 h0.76